# EAGLE board THzChipBoardPrototype (EAGLE 9.5.2)
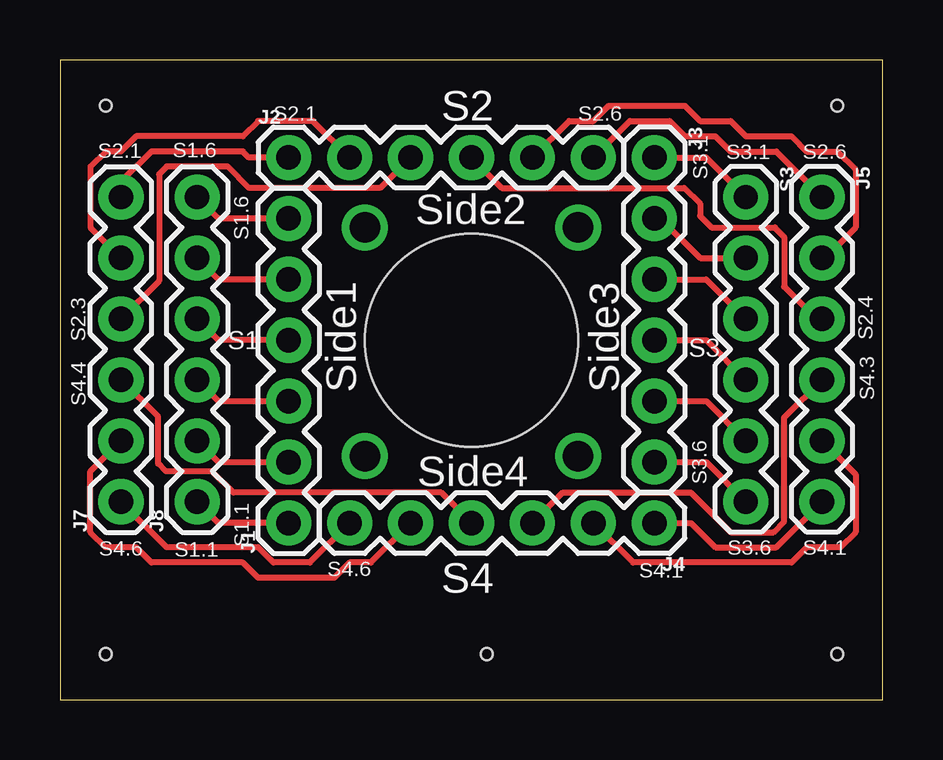
[diagram p0: board, top side]
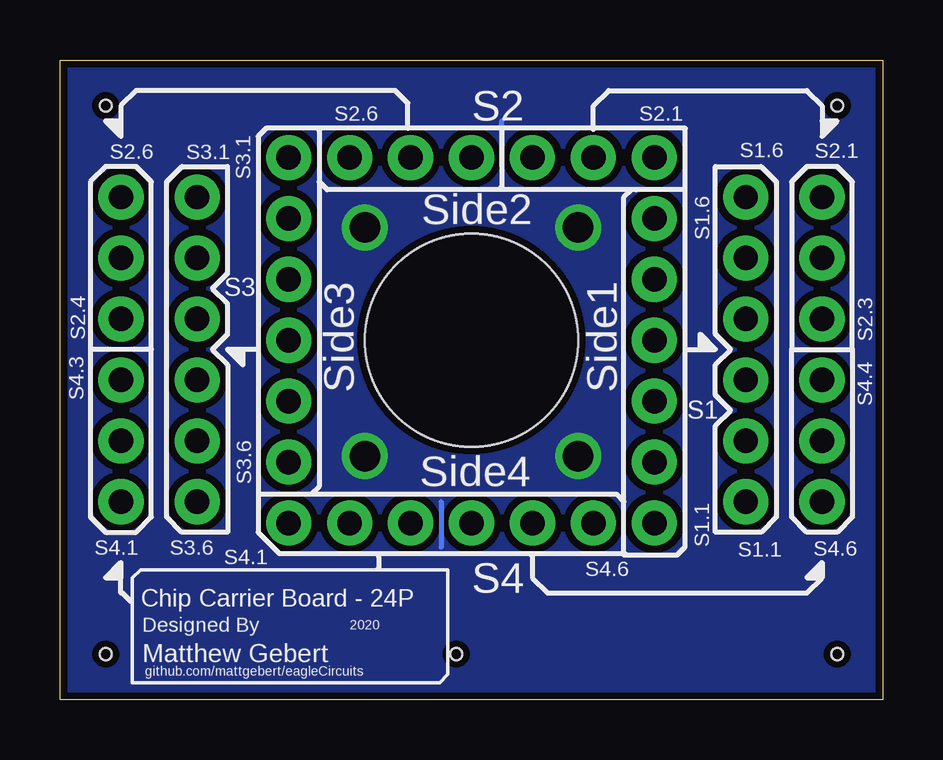
[diagram p1: board, bottom side, seen from below]

Size 34.29 x 26.67 mm. Coordinates in mm from the lower left corner, seen from the top.
Outline: 0,0 34.29,0 34.29,26.67 0,26.67 0,0
Copper layers (1*16): Top 0.035mm / dielectric 1.5mm / Bottom 0.035mm
Design rules "SparkFun": minimum track width 8mil, minimum drill 20mil, track to track 8mil, track to pad 8mil, pad to pad 8mil, via to via 8mil, smd to smd 8mil, copper to edge 8mil, drill to drill 8mil, minimum pad ring 12mil, minimum via ring 10mil, stop-mask expansion 4mil, vias tented up to drill 20mil, thermal gap 10mil
Holes 8.89 mm at 17.14,14.99
Holes 0.5 mm at 1.91,1.91 17.78,1.91 1.91,24.77 32.39,24.77 32.39,1.91

## Footprints (pad centres in the part's own frame; a part is rotated, then mirrored left to right if it is on the bottom)
1X06 = drill 1.016 pad 1.88: 1 0,0; 2 2.54,0; 3 5.08,0; 4 7.62,0; 5 10.16,0; 6 12.7,0

## Placement (x,y rotation side)
J1  [1X06]  9.53,7.37 90 top
J2  [1X06]  9.53,22.61 0 top
J3  [1X06]  24.76,22.61 270 top
J4  [1X06]  24.76,7.37 180 top
J5  [1X06]  31.75,20.95 270 top
J7  [1X06]  2.54,8.26 90 top
J8  [1X06]  5.71,8.26 90 top
S3  [1X06]  28.57,20.95 270 top

## Library data of the parts
J1-J5 J7 J8 S3 = SparkFun-Connectors; OC_FARNELL: unknown; PROD_ID: CONN-08437

## Nets
S1.1: J1.1 J8.1
S1.2: J1.2 J8.2
S1.3: J1.3 J8.3
S1.4: J1.4 J8.4
S1.5: J1.5 J8.5
S1.6: J1.6 J8.6
S2.1: J2.1 J7.6
S2.2: J2.2 J7.5
S2.3: J2.3 J7.4
S2.4: J2.4 J5.3
S2.5: J2.5 J5.2
S2.6: J2.6 J5.1
S3.1: J3.1 S3.1
S3.2: J3.2 S3.2
S3.3: J3.3 S3.3
S3.4: J3.4 S3.4
S3.5: J3.5 S3.5
S3.6: J3.6 S3.6
S4.1: J4.1 J5.6
S4.2: J4.2 J5.5
S4.3: J4.3 J5.4
S4.4: J4.4 J7.3
S4.5: J4.5 J7.2
S4.6: J4.6 J7.1

## Tracks (layer width: path | path; a pad name or v marks a point on that pad's centre or on a via)
GND  (via drill 1.27)
  Bottom 0.203: 15.88,22.23 15.88,24.13 | 18.41,8.26 18.41,6.35
  other vias: 12.7,19.68 21.59,19.68 12.7,10.16 21.59,10.16
  pour Bottom (isolate 0.305): 0,26.67 0,0 34.29,0 34.29,26.67
  pour Bottom (isolate 0.305): 0,26.67 0,0 34.29,0 34.29,26.67
S1.1
  Top 0.254: J8.1 6.6,7.37 J1.1
S1.2
  Top 0.254: J1.2 6.6,9.91 J8.2
S1.3
  Top 0.254: J8.3 6.6,12.45 J1.3
S1.4
  Top 0.254: J8.4 6.6,14.99 J1.4
S1.5
  Top 0.254: J8.5 6.6,17.53 J1.5
S1.6
  Top 0.254: J8.6 6.6,20.07 J1.6
S2.1
  Top 0.254: J2.1 7.87,22.61 7.62,22.86 3.81,22.86 2.54,21.59 J7.6
S2.2
  Top 0.254: J2.2 10.54,24.13 8.26,24.13 7.62,23.5 3.17,23.5 2.54,22.86 1.91,22.86 1.27,22.23 1.27,19.68 J7.5
S2.3
  Top 0.254: J7.4 4.13,17.46 4.13,21.91 4.45,22.23 6.99,22.23 7.87,21.34 13.34,21.34 J2.3
S2.4
  Top 0.254: J2.4 18.41,21.34 26.01,21.34 26.67,20.68 26.67,20.17 27.15,19.68 29.78,19.68 30.17,19.29 30.17,17.22 31.52,15.88 J5.3
S2.5
  Top 0.254: J2.5 21.21,24.13 22.22,24.13 22.86,24.77 26.04,24.77 26.67,24.13 27.94,24.13 28.57,23.5 30.48,23.5 31.11,22.86 32.39,22.86 33.15,22.1 33.15,19.68 31.88,18.41 J5.2
S2.6
  Top 0.254: J2.6 23.75,24.13 25.4,24.13 26.04,23.5 27.3,23.5 27.94,22.86 29.84,22.86 J5.1
S3.1
  Top 0.254: J3.1 26.92,22.61 S3.1
S3.2
  Top 0.254: J3.2 25.02,20.07 26.67,18.41 S3.2
S3.3
  Top 0.254: J3.3 26.92,17.53 S3.3
S3.4
  Top 0.254: J3.4 26.92,14.99 S3.4
S3.5
  Top 0.254: J3.5 26.92,12.45 S3.5
S3.6
  Top 0.254: J3.6 26.92,9.91 S3.6
S4.1
  Top 0.254: J4.1 26.29,7.37 27.3,6.35 29.84,6.35 J5.6
S4.2
  Top 0.254: J5.5 33.15,9.4 33.15,6.99 32.51,6.35 31.11,6.35 30.48,5.71 23.88,5.71 J4.2
S4.3
  Top 0.254: J4.3 20.95,8.64 26.29,8.64 27.94,6.99 29.73,6.99 30.17,7.43 30.17,11.76 J5.4
S4.4
  Top 0.254: J4.4 15.88,8.64 7.24,8.64 6.35,9.53 4.41,9.53 4.09,9.84 4.09,11.8 2.55,13.34 J7.3
S4.5
  Top 0.254: J4.5 12.95,5.71 12.06,5.71 11.43,5.08 8.26,5.08 7.62,5.71 3.81,5.71 3.17,6.35 1.91,6.35 1.27,6.99 1.27,9.53 J7.2
S4.6
  Top 0.254: J4.6 10.41,5.71 8.89,5.71 8.26,6.35 4.45,6.35 J7.1

## Text on the board
tPlace: S2.1 | S2 | S2.6 | S2.1 | S1.6 | S3.1 | S2.6 | S3.1 | Side2 | S1.6 | S2.3 | S1 | S2.4 | S3 | Side1 | Side3 | S4.4 | S4.3 | Side4 | S3.6 | S4.6 | S1.1 | S1.1 | S3.6 | S4.1 | S4.6 | S4.1 | S4
bPlace: S2.1 | S2 | S2.6 | S2.1 | S1.6 | S3.1 | S2.6 | S3.1 | Side2 | S1.6 | S3 | S2.3 | S2.4 | Side1 | Side3 | S4.4 | S1 | S4.3 | Side4 | S3.6 | S4.6 | S1.1 | S1.1 | S4.1 | S3.6 | S4.1 | S4.6 | S4 | Chip Carrier Board - 24P | 2020 | Designed By | Matthew Gebert | github.com/mattgebert/eagleCircuits